# Altium PCB SLT.PcbDoc (part 5 of 8)
Units mm, origin at the board's own origin, x right, y up, seen from the top; angles counter-clockwise.
Board outline 150 x 66 mm, 6 copper layers (L1 TOP, L2 GND 1, L3 SIGNAL, L4 PWR, L5 GND 2, L6 BOT), stack 1.598 mm thick; 797 components, 541 nets, 2680 pads, 2120 vias.
Unrouted connection lines stored in the file: 31.
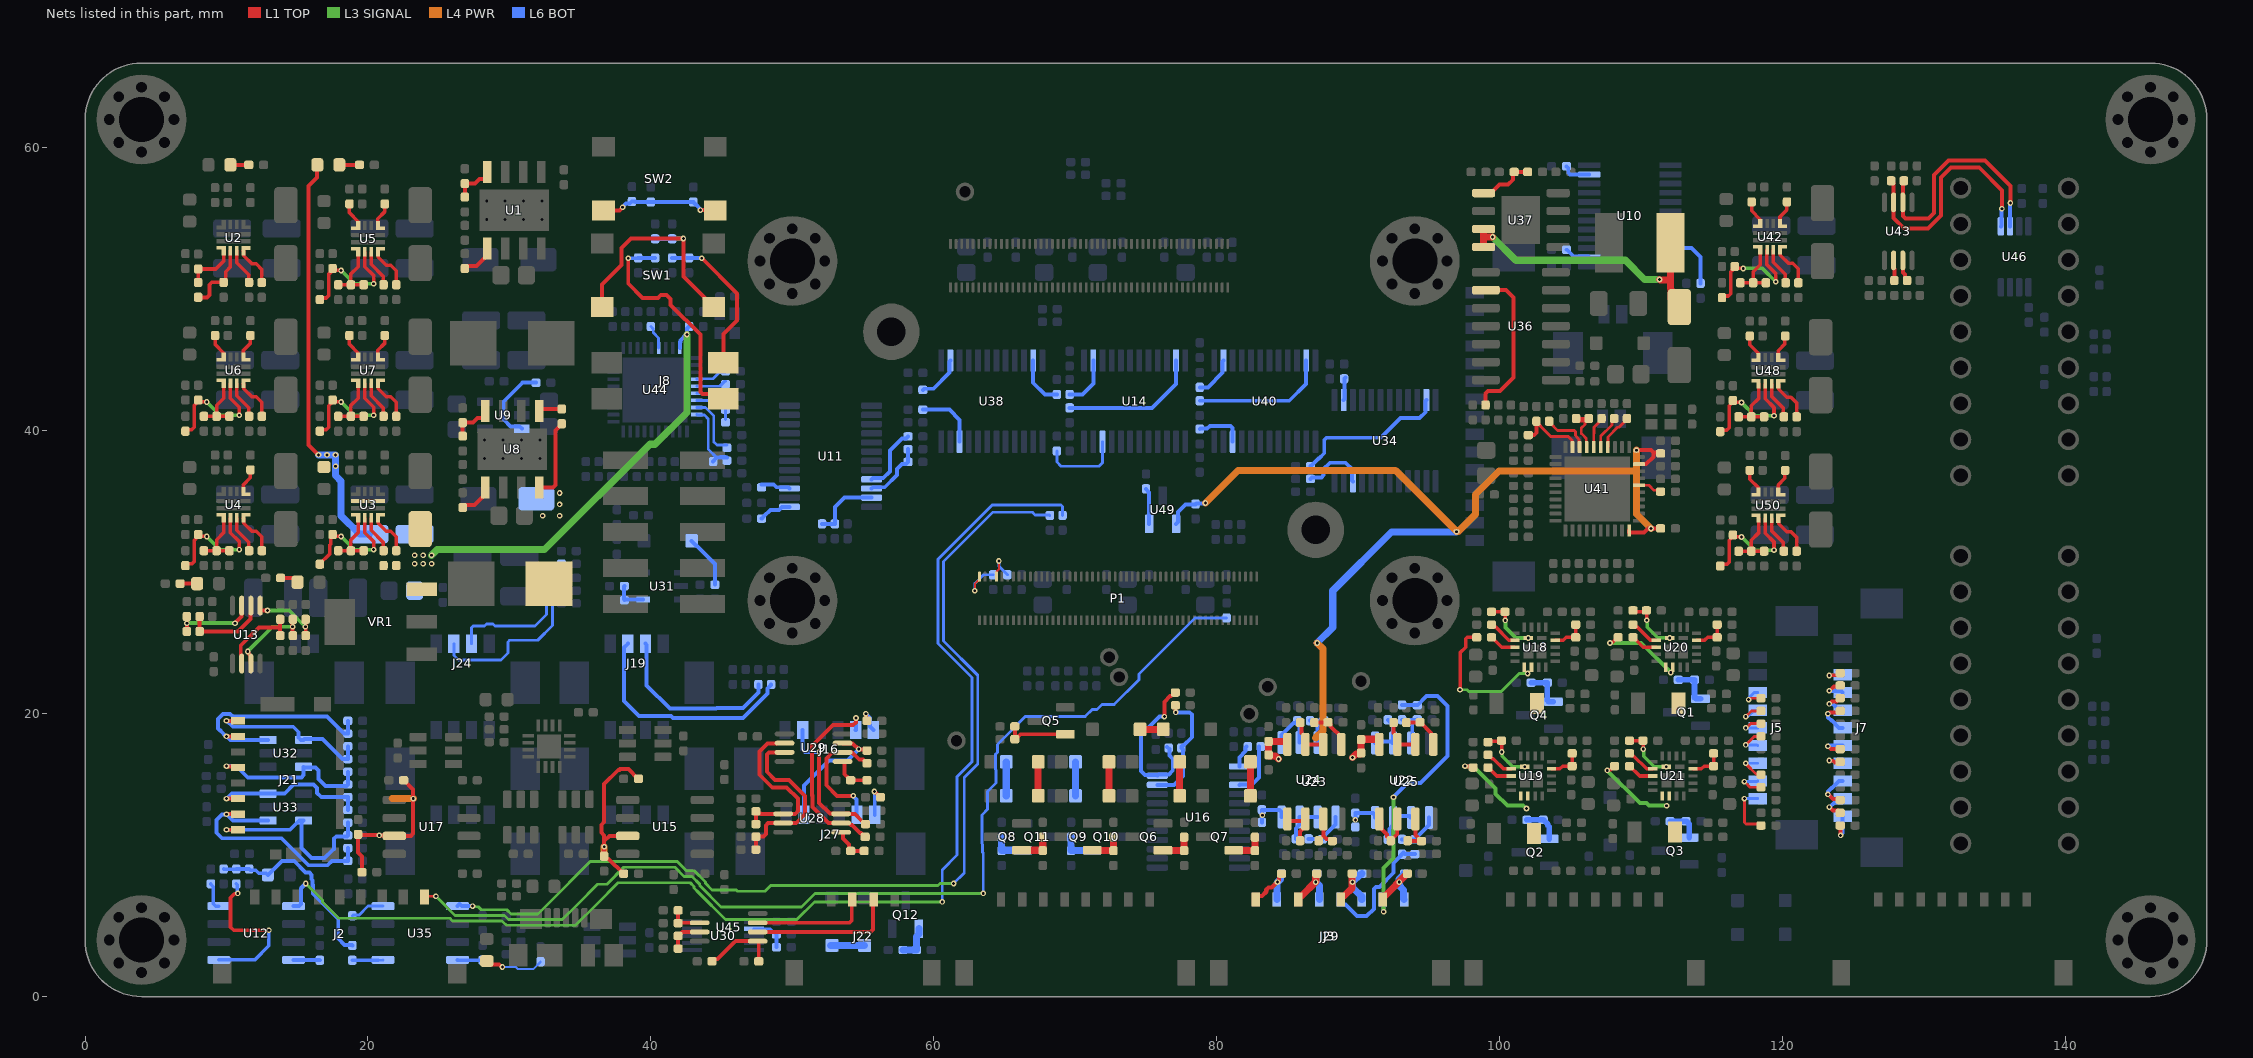
[diagram p9: the nets of this part, all layers, seen from the top]

## Via types
v1: diameter 0.4, hole 0.2, L1 TOP to L6 BOT, tented both sides, 2120 vias

## Nets (pads, with @x,y where several pads share a name; then routed paths per layer and width w, separated by ;. In a path a pad name is that pad's centre, name@x,y a point inside that pad or via, vN(x,y) a via of type N, cw(c..) or ccw(c..) an arc to the next point about the centre after c; other vN are vias at no path point) (continued)
NetC17_2: C17.2 U4.7 | length 1.8
  L1 TOP w0.25: U4.7@11.201,35.674 11.201,36.2 11.672,36.671 11.672,37.219 C17.2@11.693,37.24
NetC22_2: C22.2 U5.10 | length 1.8
  L1 TOP w0.25: C22.2@18.693,56.04 18.693,55.408 19.276,54.825 19.276,54.499 U5.10@19.301,54.474
NetC23_2: C23.2 U5.7 | length 1.8
  L1 TOP w0.25: U5.7@20.701,54.474 20.701,55 21.172,55.471 21.172,56.019 C23.2@21.193,56.04
NetC24_2: C24.2 U6.10 | length 1.8
  L1 TOP w0.25: C24.2@9.193,46.74 9.193,46.108 9.776,45.525 9.776,45.199 U6.10@9.801,45.174
NetC25_2: C25.2 U6.7 | length 1.8
  L1 TOP w0.25: U6.7@11.201,45.174 11.201,45.7 11.672,46.171 11.672,46.719 C25.2@11.693,46.74
NetC28_1: C28.1 D10.1 L2.1 U8.8 | length 5.7
  L1 TOP w0.28: U8.8@32.105,36 33.086,36 33.25,36.164 33.25,40.03 33.7,40.48 C28.1@33.7,40.5
  other v1: 32.35,34 33.55,34 33.55,34.8 33.55,35.6
NetC28_2: C28.2 U8.1 | length 1.7
  L1 TOP w0.28: U8.1@32.105,41.4 32.255,41.55 C28.2@33.7,41.55
NetC33_2: C33.2 U7.10 | length 1.8
  L1 TOP w0.25: C33.2@18.693,46.74 18.693,46.108 19.276,45.525 19.276,45.199 U7.10@19.301,45.174
NetC34_2: C34.2 U7.7 | length 1.8
  L1 TOP w0.25: U7.7@20.701,45.174 20.701,45.7 21.172,46.171 21.172,46.719 C34.2@21.193,46.74
NetC39_2: C39.2 R73.1 SW1.2 SW1.4 | length 17.2
  L1 TOP w0.28: SW1.2@36.55,48.75 36.55,50.35 37.91,51.71 37.91,52.91 38.6,53.6 v1(42.3,53.6) 42.3,50.9 43.79,49.41 43.79,49.31 44.35,48.75 SW1.4@44.45,48.75
  L6 BOT w0.28: R73.1@40.3,53.575 C39.2@41.5,53.575 41.512,53.588 42.288,53.588 v1(42.3,53.6)
NetC40_2: C40.2 R76.1 R77.1 SW2.2 SW2.4 | length 8.5
  L1 TOP w0.28: SW2.2@36.65,55.575 37.775,55.575 v1(38,55.8) ; v1(43.5,55.6) 44.525,55.6 SW2.4@44.55,55.575
  L6 BOT w0.28: v1(38,55.8) 38.254,56.054 38.506,56.054 R77.1@38.665,56.213 ; R77.1@38.665,56.214 38.679,56.2 38.9,56.2 38.925,56.175 R76.1@40,56.175 42.98,56.175 C40.2@43,56.155 ; C40.2@43,56.175 C40.2@43,56.155 ; v1(43.5,55.6) 43.477,55.623 43.477,55.698 43.179,55.996 43.159,55.996 C40.2@43,56.155
NetC67_2: C67.2 R96.1 R98.2 R257.1 R261.1 | length 13.7
  L6 BOT w0.25: R96.1@9.8,9.025 9.825,9 10.675,9 R261.1@10.7,9.025 R98.2@11.547,9.025 ; R98.2@11.6,9.025 11.696,8.929 12.071,8.929 12.271,8.729 12.796,8.729 C67.2@12.925,8.6
  L6 BOT w0.28: C67.2@12.925,8.6 12.925,8.611 13.249,8.935 13.26,8.935 13.914,9.589 14.789,9.589 15.599,8.78 15.856,8.78 16.02,8.616 16.02,8.301 16.09,8.231 16.09,7.897 16.1,7.887 16.1,7.3 17.9,5.5 17.9,4.1 18.352,3.648 18.877,3.648 R257.1@18.9,3.625
NetC110_1: C110.1 L3.1 U18.6 U18.7 | length 9.9
  L1 TOP w0.25: v1(97.2,21.7) 97.2,24.31 97.6,24.71 97.6,25.3 97.7,25.4 C110.1@98.375,25.4
  L3 SIGNAL w0.2: v1(97.2,21.7) 97.206,21.694 97.7,21.694 97.814,21.58 100.116,21.58 101.381,22.845 v1(101.979,22.845)
NetC110_2: C110.2 U18.3 | length 1.9
  L1 TOP w0.25: C110.2@99.425,25.4 99.45,25.4 100.15,24.7 U18.3@101.075,24.7
NetC111_1: C111.1 L4.1 U19.6 U19.7 | length 6.4
  L1 TOP w0.25: v1(97.55,16.3) 97.579,16.271 98.054,16.271 C111.1@98.125,16.2
  L3 SIGNAL w0.28: v1(97.55,16.3) 97.573,16.277 98.166,16.277 99.72,14.723 99.72,14.337 100.547,13.51 101.658,13.51 101.868,13.3 v1(101.9,13.3)
NetC111_2: C111.2 U19.3 | length 1.9
  L1 TOP w0.25: C111.2@99.175,16.2 99.186,16.2 99.786,15.6 U19.3@100.825,15.6
NetC114_2: C114.2 U18.2 | length 2.1
  L1 TOP w0.25: C114.2@99.425,26.3 99.585,26.14 99.704,26.14 100.644,25.2 U18.2@101.075,25.2
NetC115_2: C115.2 U19.2 | length 2.1
  L1 TOP w0.25: C115.2@99.175,17.1 99.213,17.1 99.488,16.825 99.547,16.825 100.272,16.1 U19.2@100.825,16.1
NetC132_1: C132.1 L5.1 U20.6 U20.7 | length 5.9
  L1 TOP w0.25: v1(107.8,25) 107.829,25.029 107.965,25.029 108.347,25.41 C132.1@108.375,25.41
  L3 SIGNAL w0.28: v1(107.8,25) 110.007,25 v1(112.1,22.907)
NetC132_2: C132.2 U20.3 | length 1.9
  L1 TOP w0.25: C132.2@109.425,25.41 109.45,25.41 110.15,24.71 U20.3@111.075,24.71
NetC133_1: C133.1 L6.1 U21.6 U21.7 | length 5.9
  L1 TOP w0.25: v1(107.6,16) 107.629,16.029 107.815,16.029 108.086,16.3 C133.1@108.125,16.3
  L3 SIGNAL w0.28: v1(107.6,16) 109.91,13.69 110.367,13.69 110.557,13.5 v1(111.8,13.5)
NetC133_2: C133.2 U21.3 | length 1.9
  L1 TOP w0.25: C133.2@109.175,16.3 109.2,16.3 109.9,15.6 U21.3@110.825,15.6
NetC136_2: C136.2 U20.2 | length 2.1
  L1 TOP w0.25: C136.2@109.425,26.31 109.585,26.15 109.704,26.15 110.644,25.21 U20.2@111.075,25.21
NetC137_2: C137.2 U21.2 | length 2.1
  L1 TOP w0.25: C137.2@109.175,17.2 109.334,17.04 109.454,17.04 110.394,16.1 U21.2@110.825,16.1
NetC146_2: C146.2 R158.2 U22.3 | length 2.9
  L6 BOT w0.28: R158.2@93.1,19.575 94.15,19.575 C146.2@94.175,19.6 94.155,19.6 93.82,19.265 93.82,18.02 U22.3@93.735,17.935
NetC148_2: C148.2 R160.2 U23.3 | length 2.5
  L1 TOP w0.28: R160.2@87.2,11.025 87.2,11.045 87.365,11.209 87.371,11.209 87.535,11.373 ; U23.3@87.535,12.565 87.535,11.373 ; C148.2@88.175,11 88.023,11.152 87.756,11.152 87.535,11.373
NetC154_2: C154.2 R164.2 U22.5 | length 2.9
  L6 BOT w0.28: R164.2@93.1,11.125 94.02,11.125 94.179,11.284 94.179,11.314 95.005,12.14 U22.5@95.005,12.665
NetC156_2: C156.2 R166.2 U23.5 | length 3.3
  L1 TOP w0.28: U23.5@88.805,17.835 88.805,18.36 88.054,19.111 88.054,19.241 87.959,19.336 87.895,19.4 C156.2@87.875,19.4 87.863,19.387 87.059,19.387 87.023,19.351 R166.2@87.023,19.252 ; R166.2@87.023,19.252 R166.2@86.9,19.375 R166.2@87.023,19.252
NetC162_2: C162.2 R170.2 U24.3 | length 2.7
  L6 BOT w0.28: R170.2@86.595,19.51 86.607,19.522 C162.2@87.538,19.522 ; U24.3@87.13,17.97 87.13,19.115 C162.2@87.538,19.522 ; C162.2@87.538,19.522 87.55,19.535 C162.2@87.57,19.535 87.557,19.522 C162.2@87.538,19.522
NetC164_2: C164.2 R172.2 U25.3 | length 2.7
  L1 TOP w0.28: R172.2@93.5,11.025 93.513,11.013 C164.2@94.443,11.013 ; U25.3@94.035,12.565 94.035,11.42 C164.2@94.443,11.013 ; C164.2@94.443,11.013 94.455,11 C164.2@94.475,11 94.463,11.013 C164.2@94.443,11.013
NetC170_2: C170.2 R176.2 U24.5 | length 2.9
  L6 BOT w0.28: R176.2@86.495,11.16 86.507,11.148 87.458,11.148 C170.2@87.47,11.135 87.49,11.135 87.649,11.294 87.649,11.424 88.4,12.175 U24.5@88.4,12.7
NetC172_2: C172.2 R178.2 U25.5 | length 3
  L1 TOP w0.28: R178.2@93.4,19.375 93.412,19.387 94.362,19.387 C172.2@94.375,19.4 94.4,19.4 95.155,18.645 95.155,17.985 U25.5@95.305,17.835
NetC209_2: C209.2 R268.1 U37.5 | length 4
  L1 TOP w0.28: U37.5@98.865,56.805 99.39,56.805 99.985,57.4 100.6,57.4 100.95,57.75 100.95,58.225 C209.2@101.025,58.3 R268.1@101.975,58.3
NetC233_2: C233.2 U42.10 | length 1.8
  L1 TOP w0.25: C233.2@117.81,56.181 117.81,55.549 118.393,54.966 118.393,54.64 U42.10@118.418,54.615
NetC242_2: C242.2 U41.6 | length 1.7
  L1 TOP w0.2: U41.6@109.845,36.15 110.55,36.15 110.907,35.793 111.282,35.793 C242.2@111.375,35.7
NetC250_2: C250.2 U44.6 | length 1.8
  L6 BOT w0.2: C250.2@40,47.375 40.169,47.206 40.169,46.946 40.55,46.565 U44.6@40.55,45.845
NetC257_2: C257.2 U42.7 | length 1.8
  L1 TOP w0.25: U42.7@119.818,54.615 119.818,55.141 120.289,55.612 120.289,56.16 C257.2@120.31,56.181
NetC287_2: C287.2 U48.10 | length 1.8
  L1 TOP w0.25: C287.2@117.685,46.706 117.685,46.073 118.268,45.49 118.268,45.164 U48.10@118.293,45.139
NetC288_2: C288.2 U48.7 | length 1.8
  L1 TOP w0.25: U48.7@119.693,45.139 119.693,45.665 120.164,46.136 120.164,46.684 C288.2@120.185,46.706
NetC292_2: C292.2 U50.10 | length 1.8
  L1 TOP w0.25: C292.2@117.686,37.206 117.686,36.573 118.269,35.99 118.269,35.664 U50.10@118.294,35.639
NetC293_2: C293.2 U50.7 | length 1.8
  L1 TOP w0.25: U50.7@119.694,35.639 119.694,36.165 120.165,36.636 120.165,37.184 C293.2@120.186,37.206
NetD1_1: D1.1 R9.2 | length 1.4
  L1 TOP w0.28: D1.1@17.975,58.8 R9.2@19.4,58.8
NetD9_1: D9.1 R54.2 | length 1.3
  L1 TOP w0.28: R54.2@13.825,29.6 14.636,29.6 14.646,29.59 14.746,29.59 15.025,29.311 D9.1@15.025,29.3
NetD11_1: D11.1 R56.2 | length 1.2
  L1 TOP w0.28: R56.2@6.725,29.2 D11.1@7.925,29.2
NetD17_2: D17.2 DZ1.2 | length 1.6
  L1 TOP w0.5: DZ1.2@74.58,18.9 D17.2@76.22,18.9
NetD18_2: D18.2 DZ2.2 | length 2.4
  L1 TOP w0.5: DZ2.2@67.38,14.2 D18.2@67.38,16.6
NetD19_2: D19.2 DZ3.2 | length 2.4
  L1 TOP w0.5: DZ3.2@72.38,14.2 D19.2@72.38,16.6
NetD20_2: D20.2 DZ4.2 | length 2.4
  L1 TOP w0.5: DZ4.2@77.38,14.2 D20.2@77.38,16.6
NetD21_2: D21.2 DZ5.2 | length 2.4
  L1 TOP w0.5: DZ5.2@82.38,14.2 D21.2@82.38,16.6
NetD22_2: D22.2 DZ6.2 | length 2.4
  L6 BOT w0.5: DZ6.2@70.02,14.2 D22.2@70.02,16.6
NetD23_2: D23.2 DZ7.2 | length 2.4
  L6 BOT w0.5: DZ7.2@65.12,14.2 D23.2@65.12,16.6
NetD24_2: D24.2 DZ8.2 | length 2.4
  L6 BOT w0.5: D24.2@52.7,3.62 DZ8.2@55.1,3.62
NetD25_1: D25.1 R225.2 | length 4.3
  L1 TOP w0.28: D25.1@28.4,2.525 28.64,2.285 29.283,2.285 29.468,2.1 v1(29.5,2.1)
  L6 BOT w0.15: v1(29.5,2.1) 29.546,2.1 30.454,2.1 30.609,1.945 31.695,1.945 32.2,2.45 R225.2@32.2,2.475
NetD26_1: D26.1 R246.2 | length 3.8
  L6 BOT w0.28: D26.1@42.88,32.225 42.88,32.2 43.19,31.89 43.215,31.89 44.525,30.58 R246.2@44.525,29.125
NetD27_2: D27.2 L8.1 U37.7 U37.8 | length 20.5
  L1 TOP w0.5: U37.8@98.865,52.995 98.865,53.7 ; U37.7@98.865,54.265 98.865,53.7 ; v1(99.5,53.7) 98.865,53.7 ; v1(111.3,50.7) 111.348,50.652 112.07,50.652 ; L8.1@112.07,53.3 112.07,50.652 ; D27.2@112.7,48.75 112.125,49.325 112.125,50.013 112.07,50.068 112.07,50.652
  L3 SIGNAL w0.5: v1(99.5,53.7) 101.14,52.06 108.889,52.06 110.249,50.7 v1(111.3,50.7)
NetD36_1: D36.1 R356.2 | length 1.3
  L1 TOP w0.28: D36.1@10.275,58.8 R356.2@11.575,58.8
NetJ2_9: J2.9 R70.2 | length 74.5
  L1 TOP w0.2: J2.9@24,7.042 24.058,7.1 v1(24.8,7.1)
  L3 SIGNAL w0.2: v1(24.8,7.1) 26.15,5.75 29.546,5.75 29.648,5.75 29.948,5.45 33.735,5.45 34.809,6.524 36.235,7.95 36.886,7.95 38.086,9.15 41.698,9.15 42.348,8.5 42.902,8.5 43.45,7.952 43.45,7.848 44.948,6.35 50.65,6.35 51.6,7.3 v1(63.5,7.3)
  L6 BOT w0.2: v1@63.5,7.4 63.5,10.164 63.45,10.214 63.45,10.767 63.4,10.817 63.4,12.849 63.804,13.253 63.804,14.5 64.4,15.096 64.4,16.025 64.369,16.056 64.369,17.14 64.5,17.271 64.5,17.836 66.464,19.8 70.7,19.8 71.2,20.3 71.536,20.3 71.886,20.65 72.75,20.65 74.5,22.4 74.5,22.8 78.475,26.775 R70.2@80.7,26.775
NetJ5_3: J5.3 R57.2 | length 1.8
  L1 TOP w0.2: v1(117.6,21) 117.654,21 117.754,21.1 R57.2@118.475,21.1
  L6 BOT w0.2: v1(117.6,21) 117.638,21.038 117.638,21.138 118,21.5 J5.3@118.25,21.5
NetJ5_4: J5.4 R58.2 | length 2.3
  L1 TOP w0.2: v1(117.4,19.8) 117.8,20.2 R58.2@118.475,20.2
  L6 BOT w0.2: v1(117.4,19.8) 117.438,19.838 117.588,19.838 118,20.25 J5.4@118.25,20.25
NetJ5_5: J5.5 R59.2 | length 2
  L1 TOP w0.2: v1(117.4,19) 117.454,19 117.754,19.3 R59.2@118.475,19.3
  L6 BOT w0.2: v1(117.4,19) J5.5@118.25,19
NetJ5_6: J5.6 R60.2 | length 2.2
  L1 TOP w0.2: v1(117.4,17.8) 118,18.4 R60.2@118.475,18.4
  L6 BOT w0.2: v1(117.4,17.8) 118.2,17.8 J5.6@118.25,17.75
NetJ5_7: J5.7 R61.2 | length 2.3
  L1 TOP w0.2: v1(117.4,16.5) 117.4,16.467 118.167,15.7 R61.2@118.475,15.7
  L6 BOT w0.2: v1(117.4,16.5) J5.7@118.25,16.5
NetJ5_8: J5.8 R62.2 | length 2.3
  L1 TOP w0.2: v1(117.3,15.2) 117.7,14.8 R62.2@118.475,14.8
  L6 BOT w0.2: v1(117.3,15.2) 118.2,15.2 J5.8@118.25,15.25
NetJ5_9: J5.9 R63.2 | length 3.9
  L1 TOP w0.2: v1(117.3,14) 117.3,12.317 117.417,12.2 118.375,12.2 R63.2@118.475,12.1
  L6 BOT w0.2: v1(117.3,14) J5.9@118.25,14
NetJ7_3: J7.3 R64.2 | length 1.8
  L1 TOP w0.28: v1(123.3,22.7) 123.323,22.723 123.923,22.723 R64.2@124.075,22.875
  L6 BOT w0.28: v1(123.3,22.7) 123.323,22.723 124.223,22.723 J7.3@124.25,22.75
NetJ7_4: J7.4 R65.2 | length 1.9
  L1 TOP w0.28: v1(123.3,21.625) 123.332,21.625 123.62,21.912 123.988,21.912 R65.2@124.075,22
  L6 BOT w0.28: v1(123.3,21.625) 123.323,21.602 124.148,21.602 J7.4@124.25,21.5
NetJ7_5: J7.5 R66.2 | length 2.1
  L1 TOP w0.28: v1(123.3,20.7) 123.332,20.7 123.496,20.863 123.808,20.863 124.045,21.1 R66.2@124.075,21.1
  L6 BOT w0.28: v1(123.3,20.7) 123.323,20.677 123.573,20.677 123.848,20.402 124.098,20.402 J7.5@124.25,20.25
NetJ7_6: J7.6 R67.2 | length 2.6
  L1 TOP w0.28: v1(123.2,20) 123.232,20 123.33,20.098 123.973,20.098 R67.2@124.075,20.2
  L6 BOT w0.28: v1(123.2,20) 123.223,19.977 123.223,19.746 123.459,19.51 123.49,19.51 124,19 J7.6@124.25,19
NetJ7_7: J7.7 R68.2 | length 2
  L1 TOP w0.28: v1(123.2,17.7) 123.219,17.7 123.419,17.5 R68.2@124.075,17.5
  L6 BOT w0.28: v1(123.2,17.7) 123.232,17.7 123.282,17.75 J7.7@124.25,17.75
NetJ7_8: J7.8 R69.2 | length 1.9
  L1 TOP w0.28: v1(123.3,16.7) 123.323,16.677 123.58,16.677 123.697,16.56 123.785,16.56 123.825,16.6 R69.2@124.075,16.6
  L6 BOT w0.28: v1(123.3,16.7) 123.323,16.677 124.073,16.677 J7.8@124.25,16.5
NetJ7_9: J7.9 R94.2 | length 2.6
  L1 TOP w0.28: v1(123.2,14.3) 123.232,14.3 123.568,13.964 124.011,13.964 R94.2@124.075,13.9
  L6 BOT w0.28: v1(123.2,14.3) 123.223,14.323 123.223,14.504 123.459,14.74 123.49,14.74 124,15.25 J7.9@124.25,15.25
NetJ7_10: J7.10 R71.2 | length 2.1
  L1 TOP w0.28: v1(123.3,13.4) 123.332,13.4 123.579,13.154 123.921,13.154 R71.2@124.075,13
  L6 BOT w0.28: v1(123.3,13.4) 123.332,13.4 123.672,13.74 123.99,13.74 J7.10@124.25,14
NetJ7_11: J7.11 R97.2 | length 2.1
  L1 TOP w0.28: R97.2@124.075,12.1 124.087,12.088 124.087,11.413 v1(124.1,11.4)
  L6 BOT w0.28: v1(124.1,11.4) 124.1,11.432 124.25,11.582 J7.11@124.25,12.75
NetJ8_1: J8.1 R78.2 R82.1 | length 16.6
  L1 TOP w0.28: v1(38.4,52.2) 38.4,50.4 39.4,49.4 40.507,49.4 40.697,49.59 41.103,49.59 41.39,49.303 41.39,48.91 43.5,46.8 43.5,42.758 43.664,42.594 44.791,42.594 J8.1@45.13,42.255
  L6 BOT w0.28: v1(38.4,52.2) 39.075,52.2 R78.2@39.1,52.225 R82.1@40.3,52.225
NetJ8_2: J8.2 R80.2 R83.1 | length 11
  L1 TOP w0.28: v1(43.6,52.2) 46.1,49.7 46.1,47.8 45.13,46.83 J8.2@45.13,44.795
  L6 BOT w0.28: R83.1@41.5,52.225 43.543,52.225 43.568,52.2 v1(43.6,52.2)
NetJ16_1: J16.1 R322.1 | length 1.9
  L1 TOP w0.28: v1(55.2,20) 55.223,19.977 55.223,19.552 R322.1@55.275,19.5
  L6 BOT w0.28: v1(55.2,20) 55.492,19.708 55.492,19.083 J16.1@55.725,18.85
NetJ16_2: J16.2 R215.2 U28.6 | length 13.9
  L1 TOP w0.28: v1(54.5,19.7) 54.492,19.692 54.492,19.392 54.3,19.2 52.879,19.2 51.39,17.711 51.39,14.231 51.41,14.211 51.41,13.419 52.541,12.288 52.893,12.288 52.906,12.275 53.994,12.275 54.129,12.14 54.217,12.14 54.797,11.56 54.86,11.56 55.12,11.3 R215.2@55.15,11.3
  L6 BOT w0.28: J16.2@54.475,18.85 54.488,18.862 54.488,19.688 v1(54.5,19.7)
NetJ16_5: J16.5 R216.2 U28.7 | length 10.1
  L1 TOP w0.28: v1(51.9,17.3) 51.9,13.7 52.662,12.938 53.981,12.938 54.007,12.912 54.42,12.912 54.978,12.354 55.021,12.354 R216.2@55.175,12.2
  L6 BOT w0.28: J16.5@50.725,18.85 50.725,17.475 50.9,17.3 v1(51.9,17.3)
NetJ19_2: J19.2 R90.1 | length 12.6
  L6 BOT w0.28: J19.2@39.625,24.95 39.7,24.875 39.7,22 41.34,20.36 44.616,20.36 44.656,20.4 46.5,20.4 47.6,21.5 R90.1@47.6,22.075
NetJ19_3: J19.3 R127.1 | length 16.3
  L6 BOT w0.28: J19.3@38.375,24.95 38.115,24.69 38.115,24.291 38.1,24.276 38.1,20.9 39.16,19.84 41.416,19.84 41.556,19.7 46.521,19.7 48.24,21.419 48.24,21.785 48.5,22.045 R127.1@48.5,22.075
NetJ21_P1: J21.P1 R234.1 R245.2 U33.3 | length 14.1
  L1 TOP w0.28: v1(10,11.8) J21.P1@10.802,11.8
  L6 BOT w0.28: v1(10,11.8) 14.495,11.8 15.145,12.45 U33.3@15.455,12.45 15.3,12.295 15.3,10.521 16.021,9.8 16.945,9.8 17.6,10.455 17.6,11.166 17.764,11.33 18.505,11.33 R234.1@18.575,11.4 R245.2@18.575,12.3
NetJ21_P2: J21.P2 R235.1 R247.2 U33.4 | length 17
  L1 TOP w0.28: v1(10,12.9) J21.P2@10.802,12.9
  L6 BOT w0.28: U33.4@12.945,12.45 10.45,12.45 v1(10,12.9) 9.977,12.877 9.691,12.877 9.3,12.486 9.3,11.59 9.69,11.2 13.9,11.2 15.81,9.29 17.156,9.29 17.466,9.6 R247.2@18.575,9.6 R235.1@18.575,10.5
NetJ21_P3: J21.P3 R237.1 R250.2 U33.6 | length 11.3
  L1 TOP w0.28: v1(10,14) J21.P3@10.802,14
  L6 BOT w0.28: v1(10,14) 10.032,14 10.382,14.35 U33.6@12.945,14.35 14.117,14.35 14.752,14.985 16.158,14.985 16.4,14.743 16.4,14.4 16.7,14.1 R237.1@18.575,14.1 R250.2@18.575,13.2
NetJ21_P5: J21.P5 R236.1 R249.2 U32.3 | length 12.3
  L1 TOP w0.28: v1(10,16.3) 10.023,16.277 10.725,16.277 J21.P5@10.802,16.2
  L6 BOT w0.28: v1(10,16.3) 10.702,16.3 11.502,15.5 15.291,15.5 15.455,15.664 U32.3@15.455,16.25 15.503,16.202 16.298,16.202 16.5,16 16.5,15.4 17,14.9 18.475,14.9 R236.1@18.575,15 18.575,15.675 R249.2@18.575,15.9
NetJ21_P7: J21.P7 R232.1 R242.2 U32.6 | length 16.2
  L1 TOP w0.28: v1(10,18.4) J21.P7@10.802,18.4
  L6 BOT w0.28: U32.6@12.945,18.15 10.282,18.15 10.032,18.4 9.968,18.4 9.568,18.8 9.552,18.8 9.388,18.964 9.388,19.636 9.742,19.99 10.264,19.99 10.454,19.8 17.1,19.8 18.3,18.6 R232.1@18.575,18.6 R242.2@18.575,19.5
NetJ21_P8: J21.P8 R233.1 R243.2 U32.1 | length 11.7
  L1 TOP w0.28: v1(10,19.5) J21.P8@10.802,19.5
  L6 BOT w0.28: v1(10,19.5) 10.032,19.5 10.451,19.081 14.719,19.081 15.107,18.693 15.107,18.305 15.262,18.15 U32.1@15.455,18.15 15.505,18.2 16.8,18.2 18.2,16.8 R243.2@18.575,16.8 R233.1@18.575,17.7
NetJ22_2: J22.2 U45.7 | length 8.2
  L1 TOP w0.28: U45.7@47.55,5.225 54.036,5.225 54.2,5.389 54.2,6.82 J22.2@54.25,6.87
NetJ22_3: J22.3 U45.6 | length 10.4
  L1 TOP w0.28: U45.6@47.55,4.575 55.536,4.575 55.7,4.739 55.7,6.82 J22.3@55.75,6.87
NetJ24_2: J24.2 R253.1 | length 11.3
  L6 BOT w0.2: J24.2@27.325,24.95 27.325,26.083 27.442,26.2 28.222,26.2 28.372,26.35 28.828,26.35 28.978,26.2 31.8,26.2 32.62,27.02 32.62,30.12 33.1,30.6 R253.1@33.675,30.6
NetJ24_3: J24.3 R254.1 | length 13.3
  L6 BOT w0.2: J24.3@26.075,24.95 26.083,24.942 26.083,24.117 26.4,23.8 29.4,23.8 29.9,24.3 29.9,25.083 30.017,25.2 32,25.2 33.05,26.25 33.05,29.483 33.167,29.6 R254.1@33.675,29.6
NetJ27_1: J27.1 R323.1 | length 2.3
  L1 TOP w0.28: v1(55.8,14.5) 56.2,14.1 R323.1@56.225,14.1
  L6 BOT w0.28: v1(55.8,14.5) 55.8,14.468 55.825,14.443 J27.1@55.825,12.85
NetJ27_2: J27.2 R222.2 U29.6 | length 8.9
  L1 TOP w0.28: U29.6@53.55,17.275 53.537,17.262 52.821,17.262 52.41,16.851 52.41,14.947 53.157,14.2 v1(54.3,14.2) ; U29.6@53.563,17.262 54.227,17.262 54.729,16.76 54.926,16.76 54.985,16.76 55.245,16.5 R222.2@55.275,16.5
  L6 BOT w0.28: v1(54.3,14.2) 54.3,14.168 54.544,13.924 54.544,12.881 J27.2@54.575,12.85
NetJ27_5: J27.5 R223.2 U29.7 | length 9
  L1 TOP w0.28: U29.7@53.55,17.925 53.563,17.912 54.256,17.912 54.668,17.5 v1(54.7,17.5) 54.723,17.477 55.198,17.477 R223.2@55.275,17.4
  L6 BOT w0.28: J27.5@50.825,12.85 50.825,14.925 52.6,16.7 53.9,16.7 v1(54.7,17.5)
NetP1_1: P1.1 R79.2 | length 3.2
  L1 TOP w0.15: v1(62.9,28.7) 62.9,29.181 63.134,29.415 63.2,29.415 63.225,29.44 P1.1@63.225,29.69
  L6 BOT w0.2: v1(62.9,28.7) 62.9,29.218 63.507,29.825 R79.2@64.2,29.825
NetP1_7: P1.7 R81.2 | length 2.4
  L1 TOP w0.15: P1.7@64.425,29.69 64.45,29.715 64.45,30.054 64.6,30.204 v1(64.6,30.8)
  L6 BOT w0.2: v1(64.6,30.8) 64.6,30.425 R81.2@65.2,29.825
NetQ1_1: Q1.1 R149.2 R151.2 | length 2.9
  L6 BOT w0.4: R149.2@112.625,22.4 R151.2@113.775,22.4 113.775,21.15 113.875,21.05 Q1.1@114.2,21.05
NetQ2_1: Q2.1 R150.2 R152.2 | length 2.7
  L6 BOT w0.4: R150.2@101.925,12.5 R152.2@103.075,12.5 103.1,12.5 103.4,12.2 103.4,12.122 103.5,12.022 Q2.1@103.5,11.15
NetQ3_1: Q3.1 R153.2 R155.2 | length 2.4
  L6 BOT w0.4: R153.2@112.05,12.4 R155.2@113.175,12.4 113.2,12.4 113.4,12.2 Q3.1@113.4,11.25
NetQ4_1: Q4.1 R154.2 R156.2 | length 2.9
  L6 BOT w0.4: R154.2@102.225,22.2 R156.2@103.375,22.2 103.375,20.95 103.475,20.85 Q4.1@103.8,20.85
NetQ5_1: Q5.1 R197.1 R202.2 | length 4.6
  L1 TOP w0.28: R197.1@65.725,18.2 R202.2@65.725,19.1 ; R197.1@65.795,18.2 65.795,18.239 65.909,18.354 65.929,18.354 66.125,18.55 Q5.1@69.3,18.55
NetQ6_1: Q6.1 R198.1 R203.2 | length 2.5
  L1 TOP w0.5: Q6.1@76.2,10.35 76.225,10.325 R198.1@77.7,10.325 R203.2@77.7,11.275
NetQ7_1: Q7.1 R199.1 R204.2 | length 2.5
  L1 TOP w0.5: Q7.1@81.2,10.35 81.225,10.325 R199.1@82.7,10.325 R204.2@82.7,11.275
NetQ8_1: Q8.1 R200.1 R205.2 | length 2.5
  L1 TOP w0.5: Q8.1@66.2,10.35 67.675,10.35 R200.1@67.7,10.325 R205.2@67.7,11.275
NetQ9_1: Q9.1 R201.1 R206.2 | length 2.5
  L1 TOP w0.5: Q9.1@71.2,10.35 71.225,10.325 R201.1@72.7,10.325 R206.2@72.7,11.275
NetQ10_1: Q10.1 R207.1 R210.2 | length 2.5
  L6 BOT w0.5: R210.2@69.7,11.275 R207.1@69.7,10.325 71.025,10.325 71.05,10.35 Q10.1@71.2,10.35
NetQ11_1: Q11.1 R208.1 R211.2 | length 2.5
  L6 BOT w0.5: R211.2@64.8,11.275 R208.1@64.8,10.325 64.825,10.35 Q11.1@66.3,10.35
NetQ12_1: Q12.1 R209.1 R212.2 | length 2.5
  L6 BOT w0.5: R212.2@57.825,3.3 R209.1@58.775,3.3 58.775,4.265 58.95,4.44 Q12.1@58.95,4.8
NetR1_1: R1.1 R6.2 U2.1 | length 3.7
  L1 TOP w0.25: R6.2@7.993,50.49 R1.1@7.993,51.44 9.24,51.44 9.801,52.001 U2.1@9.801,52.727
NetR2_1: R2.1 U1.5 | length 2.5
  L1 TOP w0.28: R2.1@26.85,51.475 26.85,51.495 27.009,51.654 27.674,51.654 28.445,52.425 U1.5@28.445,52.9
NetR3_1: R3.1 R8.2 U1.4 | length 3.1
  L1 TOP w0.28: R8.2@26.85,56.525 R3.1@26.85,57.475 27.57,57.475 27.889,57.794 28.285,57.794 28.445,57.954 U1.4@28.445,58.3
NetR4_1: R4.1 U2.3 | length 5.2
  L1 TOP w0.25: 10.726,51.875 11.568,51.033 ; 10.726,51.875 11.568,51.033 ; 10.726,51.875 U2.3@10.726,52.724 10.726,51.875 ; R4.1@11.568,50.515 11.568,51.033 ; R4.1@11.568,50.515 11.568,51.033 ; R4.1@11.568,50.515 R4.1@11.593,50.49 R4.1@11.568,50.515
NetR5_1: R5.1 U2.4 | length 5.9
  L1 TOP w0.25: 11.226,52.375 11.801,51.8 ; 11.226,52.375 U2.4@11.226,52.699 ; 11.226,52.375 U2.4@11.226,52.699 ; 11.226,52.375 11.801,51.8 ; U2.4@11.226,52.699 U2.4@11.201,52.724 U2.4@11.226,52.699 ; 11.801,51.8 12.101,51.8 ; 11.801,51.8 12.101,51.8 ; 12.101,51.8 12.493,51.408 ; 12.101,51.8 12.493,51.408 ; 12.493,51.408 R5.1@12.493,50.49 12.493,51.408
NetR6_1: R6.1 R7.2 U2.2 | length 5.1
  L1 TOP w0.25: 8.8,50.1 8.8,50.336 8.964,50.5 9.783,50.5 R7.2@9.793,50.49 9.953,50.65 9.953,51.253 10.277,51.577 U2.2@10.277,52.727
  L1 TOP w0.28: R6.1@7.993,49.44 8.636,49.44 8.8,49.604 8.8,50.1
NetR11_1: R11.1 R20.2 U3.2 | length 8.2
  L1 TOP w0.25: R20.2@16.6,30.575 16.6,30.6 17.285,31.285 17.285,31.893 17.301,31.909 17.367,31.975 17.367,32.477 17.466,32.575 17.5,32.575 17.52,32.555 18.087,32.555 v1(18.107,32.535) ; U3.2@19.777,33.827 19.777,32.802 20.4,32.179 v1(20.4,31.6)
  L3 SIGNAL w0.25: v1(18.107,32.535) 19.042,31.6 v1(20.4,31.6)
NetR12_1: R12.1 U3.3 | length 2.6
  L1 TOP w0.25: U3.3@20.226,33.824 20.226,32.975 21.068,32.133 21.068,31.615 R12.1@21.093,31.59
NetR13_1: R13.1 U3.4 | length 2.9
  L1 TOP w0.25: U3.4@20.701,33.824 20.726,33.799 20.726,33.475 21.301,32.9 21.601,32.9 21.993,32.508 R13.1@21.993,31.59
NetR14_1: R14.1 R23.2 U4.2 | length 8.5
  L1 TOP w0.25: R23.2@7.1,30.475 7.214,30.589 7.554,30.589 7.722,30.758 7.722,31.3 7.722,31.501 7.715,31.508 7.715,32.251 8,32.536 8,32.575 8.02,32.555 8.587,32.555 v1(8.607,32.535) ; U4.2@10.277,33.827 10.277,32.802 10.9,32.179 v1(10.9,31.6)
  L3 SIGNAL w0.25: v1(8.607,32.535) 9.542,31.6 v1(10.9,31.6)
NetR15_1: R15.1 R19.1 R22.1 U3.1 | length 4.3
  L1 TOP w0.25: R19.1@17.9,31.525 R15.1@18.8,31.525 ; U3.1@19.308,33.862 19.308,32.808 18.8,32.3 R15.1@18.8,31.525 ; R22.1@19.7,31.525 R15.1@18.8,31.525
NetR16_1: R16.1 U4.3 | length 2.6
  L1 TOP w0.25: U4.3@10.726,33.824 10.726,32.975 11.568,32.133 11.568,31.615 R16.1@11.593,31.59
NetR17_1: R17.1 U4.4 | length 2.9
  L1 TOP w0.25: U4.4@11.201,33.824 11.226,33.799 11.226,33.475 11.801,32.9 12.101,32.9 12.493,32.508 R17.1@12.493,31.59
NetR18_1: R18.1 R21.1 R24.1 U4.1 | length 4.3
  L1 TOP w0.25: R21.1@8.4,31.525 R18.1@9.3,31.525 ; U4.1@9.808,33.862 9.808,32.808 9.3,32.3 R18.1@9.3,31.525 ; R24.1@10.2,31.525 R18.1@9.3,31.525
NetR27_1: R27.1 R31.1 R32.1 U5.1 | length 4.3
  L1 TOP w0.25: R31.1@17.9,50.325 R27.1@18.8,50.325 ; U5.1@19.308,52.662 19.308,51.608 18.8,51.1 R27.1@18.8,50.325 ; R32.1@19.7,50.325 R27.1@18.8,50.325
NetR28_1: R28.1 R34.2 U5.2 | length 8.5
  L1 TOP w0.25: R34.2@16.6,49.275 16.714,49.389 17.054,49.389 17.215,49.55 17.215,50.035 17.215,51.051 17.5,51.336 17.5,51.375 17.52,51.355 18.087,51.355 v1(18.107,51.335) ; U5.2@19.777,52.627 19.777,51.602 20.4,50.979 v1(20.4,50.4)
  L3 SIGNAL w0.25: v1(18.107,51.335) 19.042,50.4 v1(20.4,50.4)
NetR29_1: R29.1 U5.3 | length 2.6
  L1 TOP w0.25: U5.3@20.226,52.624 20.226,51.775 21.068,50.933 21.068,50.415 R29.1@21.093,50.39
NetR30_1: R30.1 U5.4 | length 2.9
  L1 TOP w0.25: U5.4@20.701,52.624 20.726,52.599 20.726,52.275 21.301,51.7 21.601,51.7 21.993,51.308 R30.1@21.993,50.39
NetR33_1: R33.1 R39.2 U6.2 | length 8.5
  L1 TOP w0.25: R39.2@7.1,39.975 7.214,40.089 7.554,40.089 7.725,40.26 7.725,40.7 7.725,41.8 7.84,41.915 7.84,41.977 7.938,42.075 8,42.075 8.02,42.055 8.587,42.055 v1(8.607,42.035) ; U6.2@10.277,43.327 10.277,42.302 10.9,41.679 v1(10.9,41.1)
  L3 SIGNAL w0.25: v1(8.607,42.035) 9.542,41.1 v1(10.9,41.1)
NetR35_1: R35.1 U6.3 | length 2.6
  L1 TOP w0.25: U6.3@10.726,43.324 10.726,42.475 11.568,41.633 11.568,41.115 R35.1@11.593,41.09
NetR36_1: R36.1 U6.4 | length 2.9
  L1 TOP w0.25: U6.4@11.201,43.324 11.226,43.299 11.226,42.975 11.801,42.4 12.101,42.4 12.493,42.008 R36.1@12.493,41.09
NetR37_1: R37.1 R38.1 R40.1 U6.1 | length 4.3
  L1 TOP w0.25: R38.1@8.4,41.025 R37.1@9.3,41.025 ; U6.1@9.808,43.362 9.808,42.308 9.3,41.8 R37.1@9.3,41.025 ; R40.1@10.2,41.025 R37.1@9.3,41.025
NetR43_1: R43.1 R47.1 R48.1 U7.1 | length 4.3
  L1 TOP w0.25: R47.1@17.9,41.025 R43.1@18.8,41.025 ; U7.1@19.308,43.362 19.308,42.308 18.8,41.8 R43.1@18.8,41.025 ; R48.1@19.7,41.025 R43.1@18.8,41.025
NetR44_1: R44.1 R49.2 U7.2 | length 8.5
  L1 TOP w0.25: R49.2@16.6,39.975 16.714,40.089 17.054,40.089 17.225,40.26 17.225,41.761 17.301,41.838 17.5,42.036 17.5,42.075 17.52,42.055 18.087,42.055 v1(18.107,42.035) ; U7.2@19.777,43.327 19.777,42.302 20.4,41.679 v1(20.4,41.1)
  L3 SIGNAL w0.25: v1(18.107,42.035) 19.042,41.1 v1(20.4,41.1)
NetR45_1: R45.1 U7.3 | length 2.6
  L1 TOP w0.25: U7.3@20.226,43.324 20.226,42.475 21.068,41.633 21.068,41.115 R45.1@21.093,41.09
NetR46_1: R46.1 U7.4 | length 2.9
  L1 TOP w0.25: U7.4@20.701,43.324 20.726,43.299 20.726,42.975 21.301,42.4 21.601,42.4 21.993,42.008 R46.1@21.993,41.09
NetR50_1: R50.1 U8.5 | length 2.5
  L1 TOP w0.28: R50.1@26.7,34.575 26.7,34.595 26.859,34.754 27.524,34.754 28.295,35.525 U8.5@28.295,36
NetR51_1: R51.1 R53.2 U8.4 | length 3.1
  L1 TOP w0.28: R53.2@26.7,39.625 R51.1@26.7,40.575 27.42,40.575 27.739,40.894 28.135,40.894 28.295,41.054 U8.4@28.295,41.4
NetR55_1: R55.1 U9.3 | length 5.6
  L6 BOT w0.28: U9.3@30.875,40.15 30.715,40.31 30.09,40.31 29.6,40.8 29.6,42.077 30.923,43.4 R55.1@31.875,43.4
NetR93_2: R93.2 U12.1 | length 88.6
  L3 SIGNAL w0.2: v1(15.6,8) 16.776,6.824 16.776,6.688 17.914,5.55 25.784,5.55 25.984,5.35 29.482,5.35 29.546,5.287 29.782,5.05 34.684,5.05 36.158,6.524 37.684,8.05 42.786,8.05 43.05,7.786 43.05,7.682 43.386,7.346 45.282,5.45 50.316,5.45 51.566,6.7 v1(60.6,6.7)
  L6 BOT w0.2: v1(60.6,6.7) 60.6,8.964 61.65,10.014 61.65,15.55 62.704,16.604 62.704,22.557 60.29,24.971 60.29,30.923 64.134,34.767 68.983,34.767 69.1,34.65 R93.2@69.1,34.025
  L6 BOT w0.3: U12.1@14.735,6.405 15.123,6.405 15.268,6.55 15.268,7.668 v1(15.6,8)
NetR95_2: R95.2 U12.4 | length 1.9
  L6 BOT w0.28: U12.4@14.735,2.595 14.745,2.585 16.59,2.585 R95.2@16.6,2.575
NetR99_2: R99.2 R105.1 U13.3 | length 5.9
  L1 TOP w0.28: v1(11.5,24.4) 11.5,24.368 11.59,24.278 11.59,24.229 11.712,24.107 11.712,23.612 U13.3@11.7,23.6 ; R105.1@14.675,25.575 v1(14.675,26.15) R99.2@14.675,26.725
  L3 SIGNAL w0.28: v1(11.5,24.4) 13.25,26.15 v1(14.675,26.15)
NetR100_2: R100.2 R103.1 U13.2 | length 5.7
  L1 TOP w0.28: U13.2@11.063,23.612 11.063,24.106 11.01,24.159 11.01,24.81 12.3,26.1 13.775,26.1 ; R103.1@13.775,25.575 13.775,26.1 ; R100.2@13.775,26.725 13.775,26.1
NetR101_2: R101.2 R106.2 U13.6 | length 6
  L1 TOP w0.28: R101.2@8.1,26.875 R106.2@8.1,25.825 10.825,25.825 11.688,26.688 11.688,27.069 11.725,27.106 U13.6@11.725,27.65
NetR102_2: R102.2 R104.2 U13.7 | length 5.9
  L1 TOP w0.28: R104.2@7.2,25.825 v1(7.2,26.4) R102.2@7.2,26.875 ; v1(10.6,26.4) 11.062,26.862 11.062,27.637 U13.7@11.075,27.65
  L3 SIGNAL w0.28: v1(7.2,26.4) v1(10.6,26.4)
NetR107_1: R107.1 R108.2 U13.5 | length 5.2
  L1 TOP w0.25: U13.5@12.375,27.65 12.375,27.346 12.421,27.3 v1(12.9,27.3) ; R107.1@15.6,25.525 15.588,25.538 15.588,26.137 v1(15.575,26.15) 15.587,26.162 15.587,26.663 R108.2@15.6,26.675
  L3 SIGNAL w0.25: v1(12.9,27.3) 14.425,27.3 v1(15.575,26.15)
NetR109_2: R109.2 R319.2 U16.22 | length 8.4
  L1 TOP w0.28: R319.2@77.075,20.6 77.087,20.588 77.087,20.113 v1(77.1,20.1)
  L6 BOT w0.28: U16.22@75.8,14.975 76.975,14.975 77.6,15.6 77.6,17.475 R109.2@77.5,17.575 ; v1(77.1,20.1) 78.076,20.1 78.24,19.936 78.24,18.34 77.657,17.757 77.582,17.757 R109.2@77.5,17.675
NetR111_2: R111.2 R318.2 U16.23 | length 11.2
  L1 TOP w0.28: v1(76.3,19.8) 76.3,20.843 76.697,21.24 76.785,21.24 77.045,21.5 R318.2@77.075,21.5
  L6 BOT w0.28: v1(76.3,19.8) 75.957,19.8 74.66,18.503 74.66,15.94 74.916,15.684 75.741,15.684 U16.23@75.8,15.625 75.885,15.71 76.625,15.71 76.89,15.975 76.89,16.81 76.648,17.052 76.648,17.497 R111.2@76.5,17.645
NetR112_2: R112.2 U16.1 | length 1.6
  L6 BOT w0.28: U16.1@81.6,16.275 81.6,16.92 82.046,17.366 82.046,17.621 R112.2@82.1,17.675
NetR113_2: R113.2 U16.3 | length 3.8
  L6 BOT w0.28: U16.3@81.6,14.975 81.634,15.009 82.509,15.009 83,15.5 R113.2@83,17.675
NetR125_1: R125.1 R281.2 U41.17 | length 3
  L1 TOP w0.2: 105.88,39.701 106.12,39.461 106.12,38.875 U41.17@106.15,38.845 ; 105.88,39.702 105.763,39.819 105.763,40.191 106.03,40.458 106.03,40.553 106.252,40.775 R281.2@106.3,40.775
  L1 TOP w0.4: R125.1@105.4,40.775 105.931,40.775 R281.2@106.1,40.775
NetR131_2: R131.2 R135.1 U18.13 | length 2.4
  L1 TOP w0.25: U18.13@103.925,25.2 104.5,25.2 104.7,25.4 R135.1@105.375,25.4 R131.2@105.375,26.3
NetR132_2: R132.2 R137.1 U19.13 | length 2.4
  L1 TOP w0.25: U19.13@103.675,16.1 104.25,16.1 104.45,16.3 R137.1@105.125,16.3 R132.2@105.125,17.2
NetR133_1: R133.1 R136.1 U18.19 | length 4
  L1 TOP w0.25: R136.1@99.425,27.2 R133.1@100.375,27.2 100.387,27.188 100.387,26.613 v1(100.4,26.6)
  L3 SIGNAL w0.28: v1(100.4,26.6) 100.423,26.577 100.423,26.084 101.157,25.35 v1(102.025,25.35)
NetR134_1: R134.1 R138.1 U19.19 | length 4.1
  L1 TOP w0.25: R138.1@99.175,18 99.225,18.05 99.975,18.05 100.025,18 R134.1@100.125,18.1 100.137,18.088 100.137,17.313 v1(100.15,17.3)
  L3 SIGNAL w0.25: v1(100.15,17.3) 100.179,17.271 100.179,17 100.928,16.25 v1(101.775,16.25)
NetR141_2: R141.2 R145.1 U20.13 | length 2.4
  L1 TOP w0.25: U20.13@113.925,25.21 114.5,25.21 114.7,25.41 115.375,25.41 R141.2@115.375,26.31
NetR142_2: R142.2 R147.1 U21.13 | length 2.4
  L1 TOP w0.25: U21.13@113.675,16.1 114.25,16.1 114.45,16.3 R147.1@115.125,16.3 R142.2@115.125,17.2
NetR143_1: R143.1 R146.1 U20.19 | length 4
  L1 TOP w0.25: R146.1@109.425,27.21 110.375,27.21 110.388,27.198 110.388,26.623 v1(110.4,26.61)
  L3 SIGNAL w0.25: v1(110.4,26.61) 110.429,26.581 110.429,26.11 111.178,25.36 v1(112.025,25.36)
NetR144_1: R144.1 R148.1 U21.19 | length 4
  L1 TOP w0.25: R148.1@109.175,18.1 R144.1@110.125,18.1 110.137,18.088 110.137,17.513 v1(110.15,17.5)
  L3 SIGNAL w0.25: v1(110.15,17.5) 110.179,17.471 110.179,17 110.928,16.25 v1(111.775,16.25)
NetR157_1: R157.1 U22.1 U22.2 | length 3.1
  L6 BOT w0.28: U22.1@91.195,17.935 91.295,18.035 92.311,18.035 92.411,17.935 U22.2@92.465,17.935 92.465,19.18 92.1,19.545 R157.1@92.1,19.575
NetR159_1: R159.1 U23.1 U23.2 | length 3
  L1 TOP w0.28: U23.1@84.995,12.565 85.13,12.43 U23.2@86.265,12.43 ; R159.1@85.9,11.025 85.9,11.671 86.265,12.036 U23.2@86.265,12.565
NetR163_1: R163.1 U22.6 U22.7 | length 3.2
  L6 BOT w0.28: R163.1@92.1,11.125 92.199,11.224 92.199,11.87 92.465,12.136 U22.7@92.465,12.665 92.565,12.765 U22.6@93.581,12.765 ; U22.6@93.581,12.765 93.681,12.665 U22.6@93.735,12.665 93.635,12.765 U22.6@93.581,12.765
NetR165_1: R165.1 U23.6 U23.7 | length 3
  L1 TOP w0.28: R165.1@85.9,19.375 85.999,19.276 85.999,18.63 86.265,18.364 U23.7@86.265,17.835 U23.6@87.535,17.835
NetR169_1: R169.1 U24.1 U24.2 | length 3.6
  L6 BOT w0.28: U24.1@84.59,17.97 84.59,18.495 85.426,19.331 85.547,19.331 R169.1@85.695,19.48 ; R169.1@85.695,19.51 R169.1@85.695,19.48 ; U24.2@85.86,17.97 85.86,19.315 R169.1@85.695,19.48
NetR171_1: R171.1 U25.1 U25.2 | length 3.6
  L1 TOP w0.28: U25.1@91.495,12.565 91.645,12.415 91.645,11.855 92.04,11.46 92.04,11.315 92.3,11.055 R171.1@92.3,11.025 ; R171.1@92.3,11.045 92.761,11.506 92.761,12.561 U25.2@92.765,12.565
NetR175_1: R175.1 U24.6 U24.7 | length 2.9
  L6 BOT w0.28: R175.1@85.595,11.16 85.595,11.906 85.86,12.171 U24.7@85.86,12.7 U24.6@87.13,12.7
NetR177_1: R177.1 U25.6 U25.7 | length 2.9
  L1 TOP w0.28: R177.1@92.5,19.375 92.5,18.629 92.765,18.364 U25.7@92.765,17.835 U25.6@94.035,17.835
NetR213_2: R213.2 R218.1 U28.3 U29.3 | length 12.6
  L1 TOP w0.28: R218.1@47.425,10.4 R213.2@47.425,11.3 47.46,11.335 47.961,11.335 48.125,11.499 48.125,12.111 48.289,12.275 U28.3@49.35,12.275 50.275,12.275 50.9,12.9 50.9,14.179 49.769,15.31 48.79,15.31 48.2,15.9 48.2,17.111 48.364,17.275 U29.3@49.45,17.275
NetR214_2: R214.2 R217.1 U28.2 U29.2 | length 12
  L1 TOP w0.28: R214.2@47.425,12.2 R217.1@47.425,13.1 47.579,12.946 47.753,12.946 47.774,12.925 U28.2@49.35,12.925 50.204,12.925 50.39,13.111 50.39,14.01 49.6,14.8 48.579,14.8 47.69,15.689 47.69,17.322 48.258,17.89 48.871,17.89 48.906,17.925 U29.2@49.45,17.925
NetR219_1: R219.1 R221.1 U28.5 | length 2.6
  L1 TOP w0.28: U28.5@53.45,11.625 53.549,11.625 53.581,11.593 53.581,11.194 54.014,10.761 54.014,10.411 R219.1@54.125,10.3 R221.1@55.075,10.3
NetR220_1: R220.1 R224.1 U29.5 | length 2.8
  L1 TOP w0.28: U29.5@53.55,16.625 53.668,16.625 53.7,16.593 53.7,15.725 53.946,15.479 53.946,15.459 54.105,15.3 R224.1@55.275,15.3
NetR230_2: R230.2 R231.2 U30.2 | length 2.6
  L6 BOT w0.2: U30.2@47.3,4.8 48.414,4.8 48.514,4.7 48.533,4.7 48.833,4.4 R231.2@48.875,4.4
  L6 BOT w0.28: R230.2@48.875,3.5 R231.2@48.875,4.4
NetR251_1: R251.1 R252.1 U31.4 | length 2.4
  L6 BOT w0.28: R252.1@38.125,29.025 38.1,29 38.1,28.1 38.125,28.075 R251.1@38.125,28.025 38.173,28.072 U31.4@39.46,28.073
NetR257_2: R257.2 U35.5 | length 2.2
  L6 BOT w0.2: U35.5@20.7,2.575 21.045,2.575 U35.5@21.065,2.595
  L6 BOT w0.28: R257.2@18.9,2.575 U35.5@20.7,2.575
NetR258_2: R258.2 U35.1 | length 71.6
  L3 SIGNAL w0.2: v1(27.4,6.4) 27.438,6.362 27.802,6.362 28.014,6.15 29.546,6.15 29.814,6.15 30.114,5.85 32.014,5.85 32.688,6.524 35.714,9.55 41.864,9.55 42.514,8.9 43.068,8.9 43.85,8.118 43.85,8.014 44.314,7.55 46.042,7.55 46.142,7.45 48.078,7.45 48.478,7.85 60.286,7.85 60.436,8 v1(61.4,8)
  L6 BOT w0.2: v1(61.4,8) 62.15,8.75 62.15,15.484 63.104,16.438 63.104,22.722 60.69,25.136 60.69,30.758 64.182,34.25 66.962,34.25 67.162,34.05 68.175,34.05 R258.2@68.2,34.025
  L6 BOT w0.28: U35.1@26.335,6.405 26.485,6.555 26.638,6.403 27.397,6.403 v1(27.4,6.4)
NetR259_1: R259.1 U35.8 | length 2.4
  L6 BOT w0.2: R259.1@18.9,5.725 18.958,5.783 19.383,5.783 20.005,6.405 U35.8@21.065,6.405
NetR261_2: R261.2 U12.5 | length 11.3
  L1 TOP w0.25: v1(10.8,7.3) 10.771,7.271 10.571,7.271 10.285,6.985 10.285,4.915 10.505,4.695 11.395,4.695 11.4,4.7 v1(13,4.7)
  L6 BOT w0.25: U12.5@9.465,2.595 9.468,2.598 11.997,2.598 13,3.6 v1(13,4.7) ; R261.2@10.7,7.975 10.771,7.904 10.771,7.329 v1(10.8,7.3)
NetR262_1: R262.1 U36.9 | length 11.2
  L1 TOP w0.28: R262.1@98.9,41.725 R262.1@99,41.825 99,42.65 99.164,42.814 100.014,42.814 100.975,43.775 100.975,49.425 100.46,49.94 U36.9@99.025,49.94
NetR263_1: R263.1 U12.8 | length 1.9
  L6 BOT w0.25: R263.1@8.9,7.975 8.9,7.936 9.068,7.768 9.068,6.573 9.237,6.405 U12.8@9.465,6.405
NetR265_2: R265.2 U35.4 | length 1.8
  L6 BOT w0.28: U35.4@26.335,2.595 26.355,2.575 R265.2@28.1,2.575
NetR266_2: R266.2 R272.1 U45.3 | length 2.5
  L1 TOP w0.28: R266.2@41.925,3.4 R272.1@41.925,4.3 41.955,4.3 42.23,4.575 U45.3@43.45,4.575
NetR270_2: R270.2 R271.1 U45.2 | length 2.4
  L1 TOP w0.28: R270.2@41.925,6.1 R271.1@41.925,5.2 41.95,5.225 U45.2@43.45,5.225
NetR273_1: R273.1 R274.1 U45.5 | length 5.3
  L1 TOP w0.28: R274.1@44.325,2.5 44.479,2.654 44.696,2.654 45.967,3.925 U45.5@47.55,3.925 47.593,3.925 47.625,3.893 R273.1@47.625,2.5
NetR277_2: R277.2 U43.7 U46.1 | length 17.2
  L1 TOP w0.28: R277.2@127.675,57.675 127.675,57.645 127.85,57.47 U43.7@127.85,56.15 127.85,55.05 128.6,54.3 130.279,54.3 131.209,55.23 131.209,57.909 131.9,58.6 133.9,58.6 135.5,57 v1(135.5,55.7)
  L6 BOT w0.28: U46.1@135.425,54.453 135.477,54.505 135.477,55.677 v1(135.5,55.7)
NetR278_2: R278.2 U43.6 U46.2 | length 17.1
  L1 TOP w0.28: R278.2@128.575,57.675 128.513,57.613 128.513,56.163 U43.6@128.5,56.15 128.513,56.137 128.513,55.187 128.7,55 130.3,55 130.69,55.39 130.69,58.069 131.721,59.1 134.3,59.1 136.1,57.3 v1(136.1,56.1)
  L6 BOT w0.28: U46.2@136.075,54.453 136.088,54.465 136.088,56.088 v1(136.1,56.1)
NetR279_1: R279.1 U43.2 | length 1.4
  L1 TOP w0.28: U43.2@127.85,52.05 127.85,51.506 127.9,51.456 R279.1@127.9,50.625
NetR280_1: R280.1 U43.3 | length 1.5
  L1 TOP w0.28: U43.3@128.5,52.05 128.513,52.037 128.513,51.205 128.661,51.057 128.661,50.764 R280.1@128.8,50.625
NetR282_2: R282.2 U41.16 | length 2.2
  L1 TOP w0.2: U41.16@106.65,38.845 106.65,39.805 106.663,39.818 106.663,40.191 106.65,40.204 106.65,40.225 107.031,40.606 107.031,40.654 107.152,40.775 R282.2@107.2,40.775
NetR283_1: R283.1 U10.22 | length 4.2
  L6 BOT w0.28: U10.22@112.07,52.925 113.55,52.925 114.2,52.275 R283.1@114.2,50.425
NetR284_1: R284.1 U10.2 | length 1.8
  L6 BOT w0.28: R284.1@104.725,52.8 104.755,52.8 105.215,52.34 106.265,52.34 U10.2@106.33,52.275
NetR285_1: R285.1 U10.11 | length 2
  L6 BOT w0.28: R285.1@104.725,58.7 104.848,58.577 104.848,58.252 104.975,58.125 U10.11@106.33,58.125
NetR286_2: R286.2 U41.15 | length 2.4
  L1 TOP w0.2: U41.15@107.15,38.845 107.15,39.631 107.931,40.412 107.931,40.654 108.052,40.775 R286.2@108.1,40.775
NetR287_2: R287.2 U41.14 | length 2.6
  L1 TOP w0.2: U41.14@107.65,38.845 107.65,39.565 108.335,40.25 108.436,40.25 108.831,40.644 108.831,40.706 R287.2@109,40.875
NetR288_2: R288.2 R353.1 U41.19 | length 5
  L1 TOP w0.2: R288.2@102.6,40.675 102.6,40.623 102.9,40.323 102.9,40.314 103.614,39.6 104.85,39.6 105.12,39.33 105.12,38.875 U41.19@105.15,38.845
  L1 TOP w0.28: R353.1@102.025,39.7 102.436,39.7 102.6,39.864 R288.2@102.6,40.623
NetR289_1: R289.1 R290.2 U44.17 | length 3.1
  L6 BOT w0.2: U44.17@43.245,42.15 44.05,42.15 44.531,41.669 45.244,41.669 45.275,41.7 R289.1@45.275,40.8
NetR291_2: R291.2 U44.16 | length 2.2
  L6 BOT w0.2: U44.16@43.245,42.65 44.372,42.65 44.622,42.4 44.653,42.431 45.106,42.431 R291.2@45.275,42.6
NetR292_2: R292.2 U44.15 | length 2.2
  L6 BOT w0.2: U44.15@43.245,43.15 44.873,43.15 45.223,43.5 R292.2@45.275,43.5
NetR293_2: R293.2 U44.14 | length 2.5
  L6 BOT w0.2: U44.14@43.245,43.65 43.275,43.68 44.38,43.68 44.807,44.107 45.182,44.107 45.182,44.307 R293.2@45.275,44.4
NetR294_2: R294.2 R355.1 U44.19 | length 5.5
  L6 BOT w0.2: U44.19@43.245,41.15 43.275,41.12 43.78,41.12 44.05,40.85 44.05,38.705 R355.1@44.655,38.1 ; 44.9,38.2 45.275,38.2 R294.2@45.375,38.1
  L6 BOT w0.28: R355.1@44.4,37.825 44.4,37.845 44.655,38.1 44.9,38.1 45.275,38.1 R294.2@45.375,38.1
NetR296_1: R296.1 U49.2 | length 2.6
  L6 BOT w0.28: R296.1@75,35.9 75,35.87 75.225,35.644 U49.2@75.225,33.421
NetR299_2: R299.2 U41.18 | length 3.4
  L1 TOP w0.2: R299.2@103.5,40.675 103.5,40.623 103.8,40.323 103.8,40.314 104.084,40.03 105.27,40.03 105.35,39.95 105.35,39.666 105.48,39.536 105.62,39.395 105.62,38.875 U41.18@105.65,38.845
NetR300_2: R300.2 U44.18 | length 4.3
  L6 BOT w0.2: U44.18@43.245,41.65 43.858,41.65 44.45,41.058 44.45,39.216 44.666,39 R300.2@45.375,39
NetR301_1: R301.1 R306.2 U42.2 | length 8.5
  L1 TOP w0.25: R306.2@115.717,49.416 115.831,49.53 116.171,49.53 116.342,49.702 116.342,50.141 116.342,51.241 116.457,51.357 116.457,51.418 116.556,51.516 116.617,51.516 116.637,51.496 117.204,51.496 v1(117.224,51.476) ; U42.2@118.894,52.768 118.894,51.743 119.517,51.12 v1(119.517,50.541)
  L3 SIGNAL w0.25: v1(117.224,51.476) 118.582,51.476 v1(119.517,50.541)
NetR302_1: R302.1 U42.3 | length 2.6
  L1 TOP w0.25: U42.3@119.343,52.765 119.343,51.916 120.185,51.074 120.185,50.556 R302.1@120.21,50.531
NetR303_1: R303.1 U42.4 | length 2.9
  L1 TOP w0.25: U42.4@119.818,52.765 119.843,52.74 119.843,52.416 120.418,51.841 120.718,51.841 121.11,51.449 R303.1@121.11,50.531
NetR304_1: R304.1 R305.1 R307.1 U42.1 | length 4.3
  L1 TOP w0.25: R305.1@117.017,50.466 R304.1@117.917,50.466 ; U42.1@118.425,52.803 118.425,51.749 117.917,51.241 R304.1@117.917,50.466 ; R307.1@118.817,50.466 R304.1@117.917,50.466
NetR309_2: R309.2 R312.2 U11.22 | length 4.5
  L6 BOT w0.28: U11.22@55.6,35.925 55.685,36.01 56.531,36.01 57.4,36.879 57.4,37.3 57.752,37.652 58.027,37.652 R312.2@58.175,37.8 R309.2@58.175,38.7
NetR310_2: R310.2 R311.2 U11.23 | length 5
  L6 BOT w0.28: R310.2@52.1,33.425 R311.2@53,33.425 53,34.6 53.675,35.275 U11.23@55.6,35.275
NetR313_2: R313.2 U11.1 | length 2.3
  L6 BOT w0.28: R313.2@47.825,33.8 47.845,33.8 48.01,33.965 48.01,33.969 48.441,34.4 49.05,34.4 49.275,34.625 U11.1@49.8,34.625
NetR314_1: R314.1 U14.22 | length 5.7
  L6 BOT w0.2: R314.1@68.7,38.575 68.7,37.8 69,37.5 71.683,37.5 71.925,37.742 U14.22@71.925,39.23
NetR315_2: R315.2 U11.3 | length 2.1
  L6 BOT w0.28: R315.2@47.825,36.2 48.686,36.2 48.876,36.01 49.715,36.01 U11.3@49.8,35.925
NetR316_1: R316.1 U11.21 | length 4.7
  L6 BOT w0.28: U11.21@55.6,36.575 55.685,36.66 56.425,36.66 56.9,37.135 56.9,38.6 57.752,39.452 58.027,39.452 R316.1@58.175,39.6
NetR317_1: R317.1 U14.2 | length 3.6
  L6 BOT w0.28: R317.1@69.6,42.575 70.5,42.575 71.275,43.35 U14.2@71.275,44.97
NetR320_1: R320.1 U14.11 | length 9.9
  L6 BOT w0.28: R320.1@69.6,41.625 75.425,41.625 77.125,43.325 U14.11@77.125,44.97
NetR321_1: R321.1 U34.22 | length 4.7
  L6 BOT w0.28: R321.1@86.625,36.6 86.725,36.7 87.391,36.7 87.555,36.864 87.555,37.3 87.997,37.743 89.103,37.743 89.56,37.286 89.56,36.495 U34.22@89.625,36.43
NetR324_1: R324.1 R329.2 U48.2 | length 8.5
  L1 TOP w0.25: R329.2@115.592,39.94 115.706,40.054 116.046,40.054 116.217,40.226 116.217,40.665 116.217,41.765 116.332,41.881 116.332,41.942 116.431,42.04 116.492,42.04 116.512,42.02 117.079,42.02 v1(117.099,42) ; U48.2@118.769,43.292 118.769,42.267 119.392,41.644 v1(119.392,41.065)
  L3 SIGNAL w0.25: v1(117.099,42) 118.034,41.065 v1(119.392,41.065)
NetR325_1: R325.1 U48.3 | length 2.6
  L1 TOP w0.25: U48.3@119.218,43.289 119.218,42.44 120.06,41.598 120.06,41.08 R325.1@120.085,41.056
NetR326_1: R326.1 U48.4 | length 2.9
  L1 TOP w0.25: U48.4@119.693,43.289 119.718,43.264 119.718,42.94 120.293,42.365 120.593,42.365 120.985,41.973 R326.1@120.985,41.056
NetR327_1: R327.1 R328.1 R330.1 U48.1 | length 4.3
  L1 TOP w0.25: R328.1@116.892,40.99 R327.1@117.792,40.99 ; U48.1@118.3,43.327 118.3,42.273 117.792,41.765 R327.1@117.792,40.99 ; R330.1@118.692,40.99 R327.1@117.792,40.99
NetR332_1: R332.1 R337.2 U50.2 | length 8.5
  L1 TOP w0.25: R337.2@115.593,30.44 115.707,30.554 116.047,30.554 116.218,30.726 116.218,31.165 116.218,32.265 116.334,32.381 116.334,32.442 116.432,32.54 116.493,32.54 116.513,32.52 117.08,32.52 v1(117.1,32.5) ; U50.2@118.77,33.792 118.77,32.767 119.393,32.144 v1(119.393,31.565)
  L3 SIGNAL w0.25: v1(117.1,32.5) 118.035,31.565 v1(119.393,31.565)
NetR333_1: R333.1 U50.3 | length 2.6
  L1 TOP w0.25: U50.3@119.219,33.789 119.219,32.94 120.061,32.098 120.061,31.58 R333.1@120.086,31.556
NetR334_1: R334.1 U50.4 | length 2.9
  L1 TOP w0.25: U50.4@119.694,33.789 119.719,33.764 119.719,33.44 120.294,32.865 120.594,32.865 120.986,32.473 R334.1@120.986,31.556
NetR335_1: R335.1 R336.1 R338.1 U50.1 | length 4.3
  L1 TOP w0.25: R336.1@116.893,31.49 R335.1@117.793,31.49 ; U50.1@118.301,33.827 118.301,32.773 117.793,32.265 R335.1@117.793,31.49 ; R338.1@118.693,31.49 R335.1@117.793,31.49
NetR340_1: R340.1 U34.2 | length 1.7
  L6 BOT w0.28: U34.2@88.975,42.17 89.037,42.232 89.037,43.712 R340.1@89.1,43.775
NetR341_1: R341.1 U34.11 | length 11.1
  L6 BOT w0.28: R341.1@86.645,37.5 86.655,37.5 87.205,38.05 87.236,38.05 87.6,38.414 87.6,39.346 87.764,39.51 91.589,39.51 91.879,39.8 91.9,39.8 93,40.9 94.346,40.9 94.76,41.314 94.76,42.105 U34.11@94.825,42.17
NetR342_1: R342.1 U38.22 | length 4.4
  L6 BOT w0.28: R342.1@59.225,41.5 61.1,41.5 61.825,40.775 U38.22@61.825,39.23
NetR343_1: R343.1 U38.2 | length 3.3
  L6 BOT w0.28: R343.1@59.225,42.9 59.299,42.974 59.97,42.974 61.11,44.114 61.11,44.905 U38.2@61.175,44.97
NetR344_1: R344.1 U38.11 | length 3.6
  L6 BOT w0.28: U38.11@67.025,44.97 67.025,43.4 67.85,42.575 R344.1@68.7,42.575
NetR345_1: R345.1 U40.22 | length 3.4
  L6 BOT w0.28: R345.1@78.8,40.125 78.846,40.171 79.325,40.171 79.509,40.355 80.961,40.355 81.109,40.207 81.109,39.246 U40.22@81.125,39.23
NetR346_1: R346.1 U40.2 | length 2.9
  L6 BOT w0.28: R346.1@78.8,43.075 79.375,43.075 80.41,44.11 80.41,44.905 U40.2@80.475,44.97
NetR347_1: R347.1 U40.11 | length 9.7
  L6 BOT w0.28: R347.1@78.8,42.125 85.125,42.125 86.325,43.325 U40.11@86.325,44.97
NTC1+: C13.2 C20.2 C35.1 C91.2 C92.2 C142.2 C143.2 C144.2 C145.2 C150.2 C151.2 C152.2 C153.2 C158.2 C159.2 C160.2 C161.2 C166.2 C167.2 C168.2 C169.2 C211.2 C213.2 C243.2 C256.2 D1.2 D4.1 J3.1 J3.3 J3.5 J3.7 J29.1 J29.3 J29.5 J29.7 JP2.2 R12.2 R13.2 R110.1 R119.1 R124.1 R126.1 U3.6 U15.7 U17.7 U22.8 U23.8 U24.8 U25.8 U41.9 U41.40 U44.9 U49.1 VR1.3 | length 186.4
  L1 TOP w0.28: D1.2@16.425,58.8 16.396,58.771 16.396,57.905 15.8,57.309 15.8,39.001 v1(16.501,38.3) ; R124.1@19.575,8.8 19.575,9.925 19.3,10.2 C91.2@19.3,11.475 19.352,11.423 20.777,11.423 20.818,11.382 21.84,11.382 U17.7@21.853,11.369 ; U17.7@21.865,11.365 23.036,11.365 23.2,11.529 v1(23.2,14) 23.2,14.65 22.55,15.3 R126.1@22.525,15.3 ; R110.1@38.075,8.7 38.05,8.7 37.004,9.746 36.859,9.746 36.7,9.905 C92.2@36.7,9.925 v1(36.7,10.6) 36.7,11 ; U15.7@38.365,11.365 37.065,11.365 36.7,11 ; R119.1@39.125,15.4 39.1,15.4 38.42,16.08 37.82,16.08 37.78,16.04 37.697,16.04 36.7,15.043 36.7,12.343 36.51,12.153 36.51,11.597 36.7,11.407 36.7,11 ; U41.40@109.15,32.955 109.15,32.81 109.16,32.8 110.2,32.8 110.5,33.1 v1(110.7,33.1) C213.2@111.375,33.1 ; v1(109.675,38.63) 110.685,38.63 110.859,38.456 ; U41.9@109.845,37.65 110.357,37.65 110.859,38.153 110.859,38.456 ; C211.2@111.375,38.4 111.319,38.456 110.859,38.456
  L1 TOP w0.3: J29.1@82.75,7.07 82.8,7.12 83.207,7.12 83.5,7.413 83.5,7.556 83.664,7.72 83.893,7.72 84.273,8.1 v1(84.3,8.1) 84.3,8.127 84.4,8.227 84.4,8.55 84.55,8.7 C158.2@84.575,8.7
  L1 TOP w0.5: v1(84.372,16.805) 84.162,17.015 83.715,17.015 83.665,17.065 C143.2@83.665,17.09 C151.2@83.665,18.04 84.95,18.04 84.995,17.995 U23.8@84.995,17.835 ; J29.3@85.75,6.87 85.75,7.07 85.8,7.12 86,7.12 87,8.12 87,8.65 87.05,8.7 C166.2@87.075,8.7 ; J29.5@88.75,6.87 88.75,7.07 88.8,7.12 89,7.12 89.575,7.695 C142.2@89.575,8.7 ; v1(89.6,16.9) 89.85,17.15 90.15,17.15 90.2,17.2 C145.2@90.2,17.225 C153.2@90.2,18.175 90.225,18.2 91.45,18.2 91.495,18.155 U25.8@91.495,17.835 ; J29.7@91.75,6.87 91.75,7.07 91.8,7.12 91.895,7.12 93.4,8.625 93.4,8.65 93.45,8.7 C150.2@93.475,8.7
  L3 SIGNAL w0.5: v1(24.5,31.2) 24.9,31.6 32.486,31.6 39.936,39.05 40.298,39.05 42.546,41.298 v1(42.546,46.81)
  L4 PWR w0.5: 21.7,14 v1(23.2,14) ; 36.7,10 v1(36.7,10.6) ; v1(79.2,34.9) 81.5,37.2 92.65,37.2 96.95,32.9 97.1,32.9 98.3,34.1 98.3,35.5 99.958,37.158 109.675,37.158 ; 87,18.3 87.5,18.8 87.5,24.6 v1(87.1,25) ; v1(109.675,38.63) 109.675,37.158 ; v1(110.7,33.1) 109.675,34.125 109.675,37.158
  L6 BOT w0.28: U44.9@42.05,45.845 42.06,45.855 42.06,46.267 42.08,46.287 42.08,46.387 42.493,46.8 42.536,46.8 v1(42.546,46.81) 42.546,47.221 C243.2@42.7,47.375 ; U49.1@77.125,33.421 77.248,33.544 77.248,34.248 77.805,34.805 C256.2@78.5,34.805 ; C256.2@78.5,34.825 78.552,34.877 79.177,34.877 v1(79.2,34.9) ; v1@83.197,12.827 83.197,13.208 C159.2@83.195,13.21 83.99,13.21 84,13.2 84.436,13.2 84.59,13.046 U24.8@84.59,12.7 ; C169.2@83.2,12.325 83.197,12.328 83.197,12.796 v1(83.228,12.827) ; v1(89.8,12.5) C161.2@89.8,12.975 91.041,12.975 91.195,12.821 U22.8@91.195,12.665
  L6 BOT w0.5: v1(16.501,38.3) v1(17.101,38.3) v1(17.701,38.3) 17.701,36.846 18.107,36.44 18.107,34.986 18.107,33.993 19.4,32.7 C13.2@20.1,32.7 ; J3.7@84.25,6.87 84.25,8.05 84.5,8.3 84.5,8.65 84.55,8.7 C144.2@84.575,8.7 ; C168.2@87.075,8.7 87.05,8.7 87,8.65 v1(87,8.1) 87.25,7.85 J3.5@87.25,6.87 ; v1(87.1,25) 88.2,26.1 88.2,28.7 92.36,32.86 v1(96.95,32.86) ; J3.3@90.25,6.87 90.25,7.07 89.6,7.72 v1(89.6,8.1) 90.15,8.65 90.225,8.65 C160.2@90.275,8.7 ; J3.1@93.25,6.87 93.2,6.92 93.2,7.55 92.9,7.85 92.9,8.325 93.2,8.625 93.2,8.65 93.25,8.7 C152.2@93.275,8.7
  other v1: 92.9,8.1 20.8,11.4 23.3,30.6 23.9,30.6 24.5,30.6 23.3,31.2 23.9,31.2 17.717,37.5
NTC1-: J3.2 R158.1 R161.2 | length 21.6
  L3 SIGNAL w0.28: v1(91.8,6) 91.8,9.107 92.5,9.807 v1(92.5,14.1)
  L6 BOT w0.28: J3.2@91.75,6.87 91.777,6.843 91.777,6.023 v1(91.8,6) ; v1(92.5,14.1) 93.5,15.1 94.4,15.1 96.3,17 96.3,20.543 95.603,21.24 94.84,21.24 94.2,20.6 R161.2@94.175,20.6 94.162,20.613 93.113,20.613 R158.1@93.1,20.625
NTC2-: J3.4 R164.1 R167.2 | length 9
  L6 BOT w0.28: J3.4@88.75,6.87 88.75,6.67 88.91,6.51 89.11,6.51 89.92,5.7 90.6,5.7 91.11,6.21 91.11,7.596 91.274,7.76 91.501,7.76 92.5,8.759 92.5,9.45 93.03,9.98 93.03,10.005 93.212,10.188 93.212,10.122 93.259,10.075 R167.2@94,10.075